# Altium PCB LedMatrixDigit.PCBDOC
Units mm, origin at the board's own origin, x right, y up, seen from the top; angles counter-clockwise.
Board outline 37.54 x 53.34 mm, 2 copper layers (Top Layer, Bottom Layer); 43 components, 68 nets, 198 pads, 47 vias.
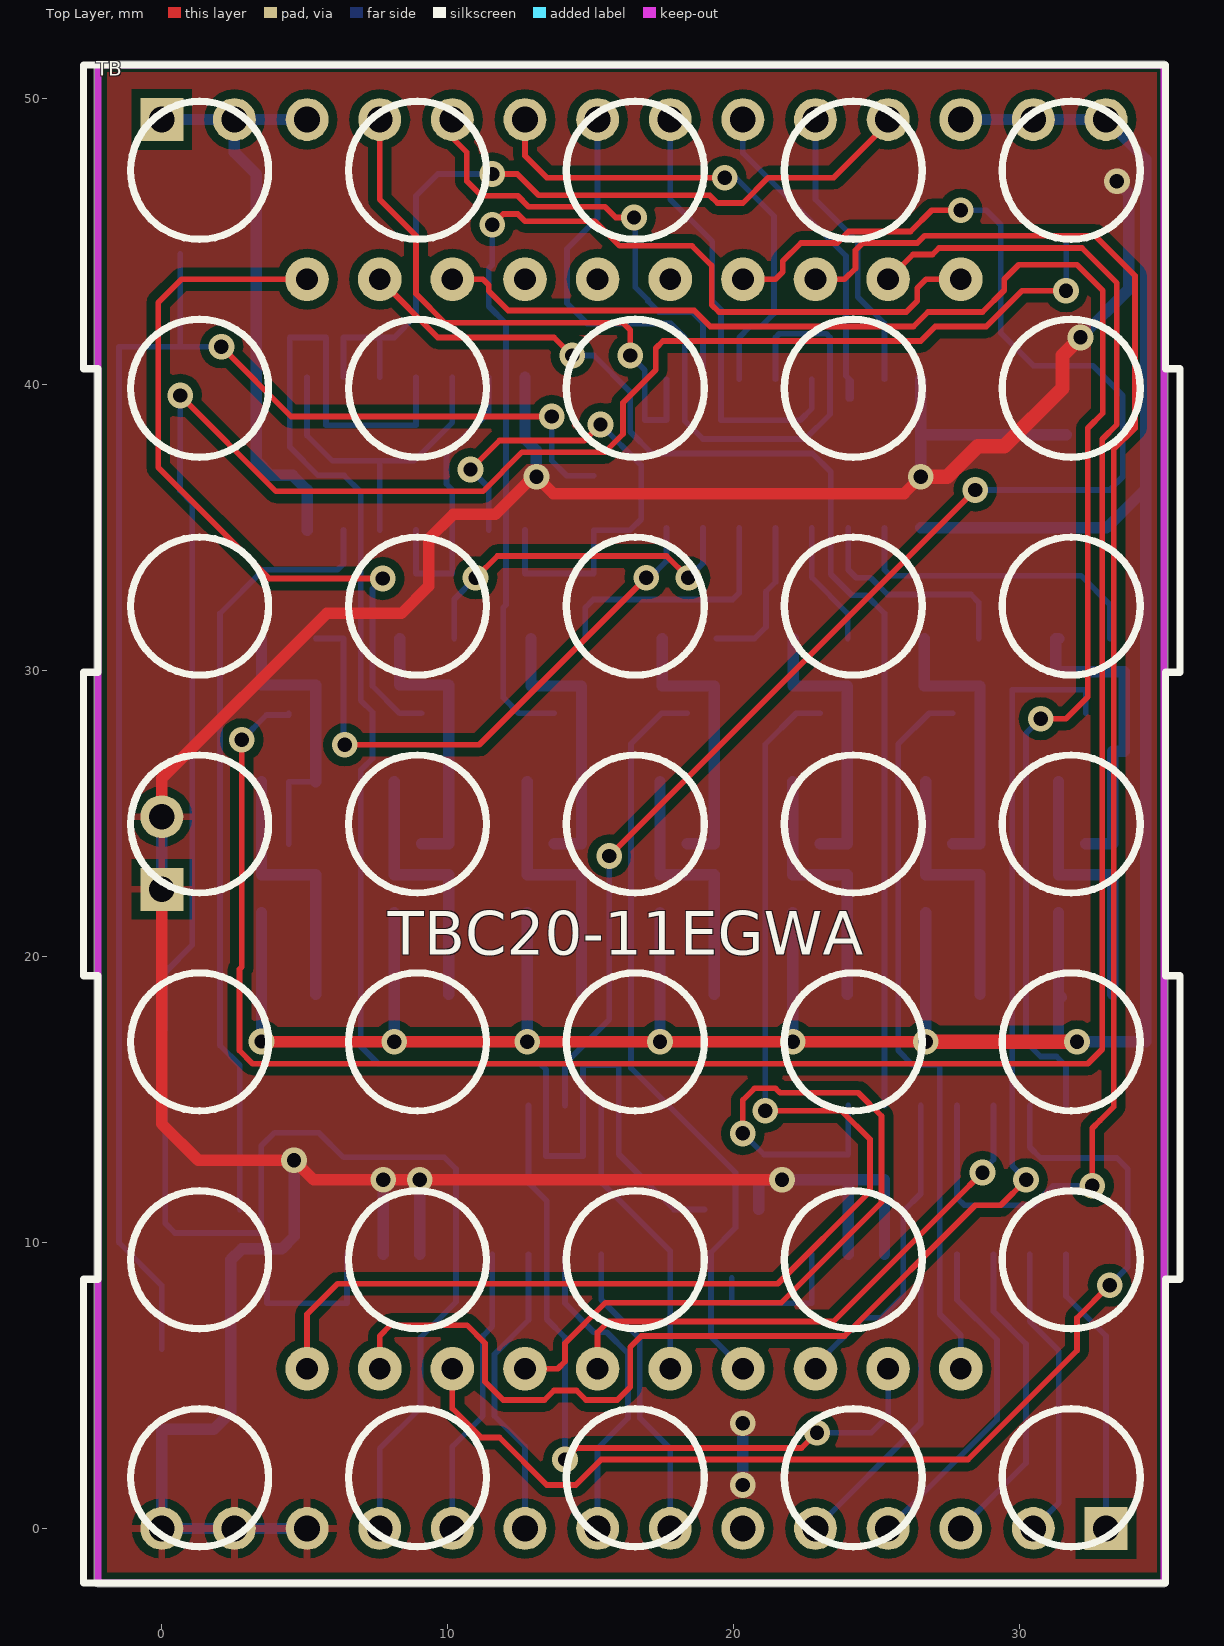
[diagram p0: Top Layer view]
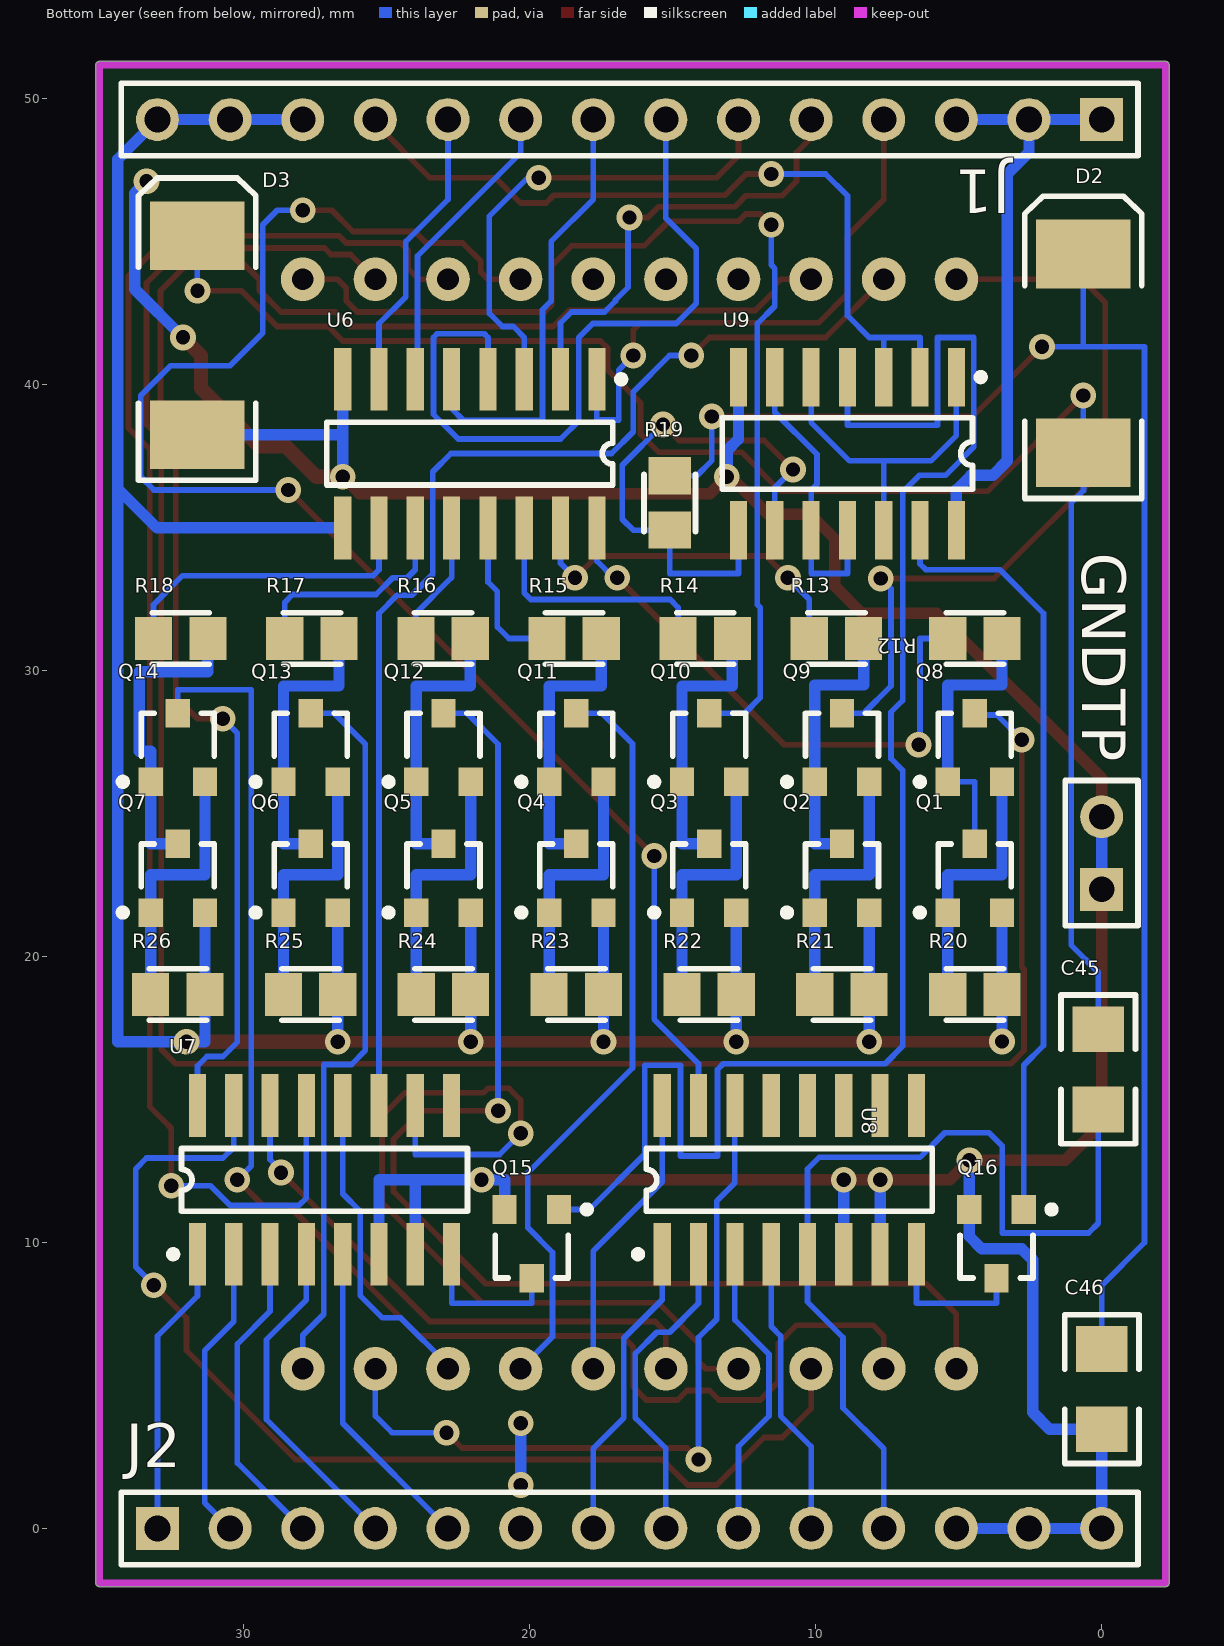
[diagram p1: Bottom Layer view, seen from below]

## Layer stack, top to bottom
Top Layer: signal copper 0.0356
Dielectric: dielectric 0.32, FR-4, Dk 4.8
Bottom Layer: signal copper 0.0356

## Board outline
-2.363,-1.905 ccw(c-2.235,-1.905) -2.235,-2.032 35.052,-2.032 ccw(c35.052,-1.905) 35.179,-1.905 35.179,51.181 ccw(c35.052,51.181) 35.052,51.308 -2.235,51.308 ccw(c-2.235,51.181) -2.363,51.181

## Design rules (kind name [scope] priority, off if disabled: settings)
Clearance Clearance_PolygonToKeepOut [InPolygon vs OnLayer('Keep-Out Layer')] p1: gap=0.1
Clearance Clearance_Polygon [InPolygon] p2: gap=0.3
Clearance Clearance_PadViaSameNet [IsPad vs IsVia] p3: gap=0.2
Clearance [All] p4: gap=0.2
FabricationTestPointUsage TestPointUsage [All] p1: valid=0 allowmultiple=FALSE
FabricationTestpoint Testpoint [All] p1: side=3 testpointundercomponent=TRUE minsize=1.016 maxsize=2.54 preferedsize=1.524 minholesize=0 maxholesize=1.016 preferedholesize=0.813 testpointgrid=0.025 allowsidetop=TRUE allowsidebottom=TRUE usegrid=TRUE gridtolerance=0
PolygonConnect [All] p1: connectstyle=Relief reliefconductorwidth=0.254 reliefentries=4 polygonreliefangle="90 Angle"
RoomDefinition LedMatrixDigit [InComponentClass('LedMatrixDigit')] p1: confinementstyle=ConfineIn formatcopy=TRUE lockcomponents=FALSE outline -3.302,-2.413 36.068,-2.413 36.068,51.689 -3.302,51.689
RoutingVias [All] p1: holewidth=0.5 width=0.9 viastyle="Through Hole" minholewidth=0.5 minwidth=0.9 maxholewidth=0.5 maxwidth=0.9
SilkscreenOverComponentPads [All] p1: minsilkscreentomaskgap=0.254
SolderMaskExpansion [All] p1: expansion=0.102
Width Width_PolygonTracks [InPolygon] p1: maxlimit=0.3 minlimit=0.2 preferedwidth=0.2
Width Width_PowerNets [InNetClass('POWERNETS')] p2: maxlimit=2.5 minlimit=0.3 preferedwidth=0.4
Width [All] p3: maxlimit=2.5 minlimit=0.2 preferedwidth=0.2
25 further rules are at their usual default settings.

## Classes and differential pairs
net class POWERNETS: 6V GND VCC
net class ROWDRIVER[6..0]: ROWDRIVER0 ROWDRIVER1 ROWDRIVER2 ROWDRIVER3 ROWDRIVER4 ROWDRIVER5 ROWDRIVER6
net class ROW[6..0]: ROW0 ROW1 ROW2 ROW3 ROW4 ROW5 ROW6
net class RED[4..0]: RED0 RED1 RED2 RED3 RED4
net class NROW[6..0]: NROW0 NROW1 NROW2 NROW3 NROW4 NROW5 NROW6
net class GREEN[4..0]: GREEN0 GREEN1 GREEN2 GREEN3 GREEN4

## Components (designator, comment, footprint, x,y, rotation, side; value= is the part's Value field where it differs from the comment)
C45 "0.22uF" C3216-1206 0.119,16.053 r270 bottom
C46 "1.0uF" C3216-1206 -0.008,4.877 r90 bottom
D2 "1N4148" DSO-C2/X3.3 0.643,41.097 r90 bottom
D3 "1N4148" DSO-C2/X3.3 31.631,41.732 r90 bottom
GNDTP "Header 2" HDR1X2 0,22.352 r90 bottom
J1 "Header 14" HDR1X14 0,49.276 r0 bottom
J2 "Header 14" HDR1X14 33.02,0 r180 bottom
Q1 "BC807-40" SOT23 4.435,22.741 r180 bottom
Q2 "BC807-40" SOT23 9.08,22.741 r180 bottom
Q3 "BC807-40" SOT23 13.726,22.741 r180 bottom
Q4 "BC807-40" SOT23 18.372,22.741 r180 bottom
Q5 "BC807-40" SOT23 23.017,22.741 r180 bottom
Q6 "BC807-40" SOT23 27.663,22.741 r180 bottom
Q7 "BC807-40" SOT23 32.309,22.741 r180 bottom
Q8 "BC807-40" SOT23 4.435,27.313 r180 bottom
Q9 "BC807-40" SOT23 9.08,27.313 r180 bottom
Q10 "BC807-40" SOT23 13.726,27.313 r180 bottom
Q11 "BC807-40" SOT23 18.372,27.313 r180 bottom
Q12 "BC807-40" SOT23 23.017,27.313 r180 bottom
Q13 "BC807-40" SOT23 27.663,27.313 r180 bottom
Q14 "BC807-40" SOT23 32.309,27.313 r180 bottom
Q15 "BSH103" SOT23 19.931,9.957 r0 bottom
Q16 "BSH103" SOT23 3.675,9.957 r0 bottom
R12 "1K" CC2012-0805 4.435,31.123 r0 bottom
R13 "1K" CC2012-0805 9.275,31.123 r0 bottom
R14 "1K" CC2012-0805 13.862,31.123 r0 bottom
R15 "1K" CC2012-0805 18.448,31.123 r0 bottom
R16 "1K" CC2012-0805 23.034,31.123 r0 bottom
R17 "1K" CC2012-0805 27.621,31.123 r0 bottom
R18 "1K" CC2012-0805 32.207,31.123 r0 bottom
R19 "1K" CC2012-0805 15.105,35.865 r270 bottom
R20 "3R9" CC2012-0805 4.435,18.677 r0 bottom
R21 "3R9" CC2012-0805 9.08,18.677 r0 bottom
R22 "3R9" CC2012-0805 13.726,18.677 r0 bottom
R23 "3R9" CC2012-0805 18.372,18.677 r0 bottom
R24 "3R9" CC2012-0805 23.017,18.677 r0 bottom
R25 "3R9" CC2012-0805 27.663,18.677 r0 bottom
R26 "3R9" CC2012-0805 32.309,18.677 r0 bottom
TB "TBC20-11EGWA" TBC20-11EGWA 5.08,5.588 r0 top locked
U6 "ULQ2003L" L16 22.098,37.592 r0 bottom
U7 "ULQ2003L" L16 27.178,12.192 r180 bottom
U8 "ULQ2003L" L16 10.922,12.192 r180 bottom
U9 "SN74LVC02AD" D014 8.89,37.592 r0 bottom

## Footprints (in the part's own frame and the unit in brackets; to place one, negate y for a bottom-side part, rotate by r counter-clockwise, add the part's x,y. Pads: shape width x height; smd on the part's side, far side on the other; paste and mask are expansions set on the pad)
C3216-1206 [mm]
  rect 1.6x1.8 smd: 1(-1.403,0) 2(1.397,0)
  silkscreen extent -2.6,-1.3 2.6,1.3
CC2012-0805 [mm]
  rect 1.3x1.5 smd: 1(-0.95,0) 2(0.95,0)
  silkscreen extent -1,-0.9 1,0.9
D014 [mm] "Small Outline; 14 Leads; Body Width 3.9 mm; Pitch 1.27 mm"
  rect 0.6x2.05 smd: 1(-3.81,-2.675) 2(-2.54,-2.675) 3(-1.27,-2.675) 4(0,-2.675) 5(1.27,-2.675) 6(2.54,-2.675) 7(3.81,-2.675) 8(3.81,2.675) 9(2.54,2.675) 10(1.27,2.675) 11(0,2.675) 12(-1.27,2.675) 13(-2.54,2.675) 14(-3.81,2.675)
  silkscreen extent -4.78,-2.8 4.37,1.25
DSO-C2/X3.3 [mm]
  rect 2.4x3.3 smd: 1(-3.475,0) 2(3.475,0)
  silkscreen extent -5.08,-2.05 5.5,2.05
HDR1X2 [mm]
  rect 1.5x1.5 hole 0.9: 1(0,0)
  round 1.5 hole 0.9: 2(2.54,0)
  silkscreen extent -1.27,-1.27 3.81,1.27
HDR1X14 [mm]
  rect 1.5x1.5 hole 0.9: 1(0,0)
  round 1.5 hole 0.9: 2(2.54,0) 3(5.08,0) 4(7.62,0) 5(10.16,0) 6(12.7,0) 7(15.24,0) 8(17.78,0) 9(20.32,0) 10(22.86,0) 11(25.4,0) 12(27.94,0) 13(30.48,0) 14(33.02,0)
  silkscreen extent -1.27,-1.27 34.29,1.27
L16 [mm] "Small Outline; 16 Leads; Body Width 3.9 mm; Pitch 1.27 mm"
  rect 0.6x2.2 smd: 1(-4.445,-2.6) 2(-3.175,-2.6) 3(-1.905,-2.6) 4(-0.635,-2.6) 5(0.635,-2.6) 6(1.905,-2.6) 7(3.175,-2.6) 8(4.445,-2.6) 9(4.445,2.6) 10(3.175,2.6) 11(1.905,2.6) 12(0.635,2.6) 13(-0.635,2.6) 14(-1.905,2.6) 15(-3.175,2.6) 16(-4.445,2.6)
  silkscreen extent -5.42,-2.72 5,1.1
SOT23 [mm] "SOT-23; 3 Leads; Body 3.0 x 2.5 mm, inc. leads (LxW max)"
  rect 0.85x1 smd: 1(-0.95,-1.2) 2(0.95,-1.2) 3(0,1.2)
  silkscreen extent -2.05,-1.32 1.27,1.2
TBC20-11EGWA [mil]
  round 60 hole 30: 1(0,0) 2(100,0) 3(200,0) 4(300,0) 5(400,0) 6(500,0) 7(600,0) 8(700,0) 9(800,0) 10(900,0) 11(900,1500) 12(800,1500) 13(700,1500) 14(600,1500) 15(500,1500) 16(400,1500) 17(300,1500) 18(200,1500) 19(100,1500) 20(0,1500)
  silkscreen extent -308,-295 1202,1795

## Part data
C45 C46: library part CAP, "Capacitor"
D2 D3: library part Diode, "Default Diode"
GNDTP: "Header, 2-Pin"
J1 J2: "Header, 14-Pin"
Q1 Q2 Q3 Q4 Q5 Q6 Q7 Q8 Q9 Q10 Q11 Q12 Q13 Q14: "PNP General-purpose Transistor"
Q15 Q16: "N-channel Enhancement Mode MOSFET"
R12 R13 R14 R15 R16 R17 R18 R19 R20 R21 R22 R23 R24 R25 R26: library part RES, "Resistor"
U6 U7 U8: "High-Voltage, High-Current Darlington Array"
U9: "Quadruple 2-Input Positive-NOR Gate"

## Via types
v1: diameter 0.9, hole 0.5, Top Layer to Bottom Layer, 47 vias

## Nets (pads, with @x,y where several pads share a name; then routed paths per layer and width w, separated by ;. In a path a pad name is that pad's centre, name@x,y a point inside that pad or via, vN(x,y) a via of type N, cw(c..) or ccw(c..) an arc to the next point about the centre after c; other vN are vias at no path point)
6V: J1.12 J1.13 J1.14 Q1.2 Q2.2 Q3.2 Q4.2 Q5.2 Q6.2 Q7.2 R20.1 R21.1 R22.1 R23.1 R24.1 R25.1 R26.1 U6.9 | length 109.7
  Top Layer w0.4: v1@3.495,17.018 v1(26.713,17.018)
  Top Layer w0.5: v1(26.713,17.018) v1(32.004,17.018)
  Bottom Layer w0.4: v1(3.485,17.028) R20.1 Q1.2 ; v1(8.13,17.018) R21.1 Q2.2 ; v1(12.776,17.018) R22.1 12.776,21.514 Q3.2 ; v1(17.422,17.018) R23.1 Q4.2 ; v1(22.067,17.018) R24.1 Q5.2 ; U6.9 33.036,34.992 34.417,36.373 ; v1(26.713,17.018) R25.1 Q6.2 ; J1.12 J1.13 J1.14 34.417,47.879 34.417,17.018 31.359,17.018 Q7.2 ; R26.1 R26.1@31.454,18.582
CG1: TB.18 U7.16 | length 56.1
  Top Layer w0.2: TB.18 11.227,43.688 11.43,43.485 11.43,43.282 12.116,42.596 18.618,42.596 19.177,42.037 26.289,42.037 26.797,42.545 28.702,42.545 29.464,43.307 29.464,43.688 29.972,44.196 32.004,44.196 32.911,43.289 32.911,39.007 32.385,38.481 32.385,29.083 31.623,28.321 v1(30.734,28.321)
  Bottom Layer w0.2: v1(30.734,28.321) 30.226,27.813 30.226,17.018 30.734,16.51 31.293,16.51 31.623,16.18 U7.16
CG2: TB.3 U7.15 | length 38.6
  Top Layer w0.2: TB.3 10.16,4.191 11.173,3.178 11.808,3.178 13.462,1.524 14.478,1.524 15.367,2.413 28.194,2.413 32.004,6.223 32.004,7.366 v1(33.147,8.509)
  Bottom Layer w0.2: U7.15 30.353,13.335 30.734,12.954 33.401,12.954 33.782,12.573 33.782,9.144 v1(33.147,8.509)
CG3: TB.5 U7.14 | length 20.2
  Top Layer w0.2: TB.5 15.24,6.858 15.621,7.239 23.495,7.239 v1(28.702,12.446) 28.24,11.984
  Bottom Layer w0.2: v1(28.702,12.446) 28.702,12.522 29.083,12.903 U7.14
CG4: TB.13 U7.13 | length 53.6
  Top Layer w0.2: TB.13 23.876,43.688 24.257,44.069 24.257,44.704 24.511,44.958 26.416,44.958 26.67,45.212 32.639,45.212 34.036,43.815 34.036,38.481 33.287,37.732 33.287,14.745 32.811,14.27 32.537,13.995 v1(32.537,11.989)
  Bottom Layer w0.2: U7.13 27.813,11.557 28.067,11.303 30.48,11.303 31.166,11.989 v1(32.537,11.989)
CG5: TB.8 U7.12 | length 11.1
  Bottom Layer w0.2: TB.8 22.86,5.715 24.511,7.366 25.146,7.366 25.933,8.153 25.933,11.1 26.543,11.709 U7.12
CR1: TB.19 U7.11 | length 42.6
  Top Layer w0.2: TB.19 9.652,41.656 13.716,41.656 v1(14.351,41.021)
  Bottom Layer w0.2: v1(14.351,41.021) 15.113,41.021 16.383,39.751 16.383,38.354 17.145,37.592 22.758,37.592 23.393,36.957 23.393,33.376 24.13,32.639 24.638,32.639 25.273,32.004 U7.11
CR2: TB.4 U7.10 | length 30.7
  Top Layer w0.2: TB.4 13.843,5.588 14.097,5.842 14.097,6.477 ; 14.166,6.546 14.097,6.477 ; v1(20.32,13.818) 20.32,14.986 20.726,15.392 21.463,15.392 21.615,15.24 24.359,15.24 25.171,14.427 25.171,11.405 21.666,7.899 15.519,7.899 14.097,6.477
  Bottom Layer w0.2: v1(20.32,13.818) 21.057,13.081 24.003,13.081 U7.10
CR3: TB.6 U8.16 | length 10.2
  Bottom Layer w0.2: U8.16 15.367,12.116 17.78,9.703 TB.6
CR4: TB.14 U8.15 | length 55.1
  Top Layer w0.2: v1(15.646,23.52) v1(28.448,36.322) ; TB.14 21.463,43.688 21.717,43.942 21.717,44.323 22.352,44.958 23.622,44.958 24.022,45.358 26.181,45.358 26.924,46.101 v1(27.94,46.101)
  Bottom Layer w0.2: U8.15 14.097,16.256 15.646,17.805 v1(15.646,23.52) ; v1(27.94,46.101) 28.829,46.101 29.337,45.593 29.337,41.808 30.48,40.665 32.563,40.665 33.604,39.624 33.604,36.779 33.147,36.322 v1(28.448,36.322)
CR5: TB.9 U8.14 | length 26.5
  Top Layer w0.2: v1(14.097,2.413) 14.497,2.813 22.371,2.813 v1(22.91,3.352)
  Bottom Layer w0.2: U8.14 12.827,12.09 13.462,11.455 13.462,7.315 14.097,6.68 v1(14.097,2.413) ; v1(22.91,3.352) 24.815,3.352 25.4,3.937 TB.9
ENABLE: J1.11 U9.2 U9.3 | length 28.4
  Top Layer w0.2: v1(11.557,47.371) 12.427,47.371 13.17,46.628 19.158,46.628 19.431,46.355 20.32,46.355 21.209,47.244 23.501,47.244 25.4,49.143 J1.11
  Bottom Layer w0.2: U9.2 6.35,41.656 8.128,41.656 8.89,42.418 8.89,46.609 9.652,47.371 v1(11.557,47.371) ; U9.3 7.62,41.656
GND: C46.1 D3.1 GNDTP.1 GNDTP.2 J2.12 J2.13 J2.14 Q15.2 Q16.2 U6.8 U7.6 U7.7 U8.6 U8.7 U9.7 | length 133.5
  Top Layer w0.4: GNDTP.1 0,14.148 1.27,12.878 v1(4.625,12.878) 5.311,12.192 v1(7.747,12.192) v1(9.017,12.192) v1(21.692,12.192) ; GNDTP.2 0,26.238 5.766,32.004 8.382,32.004 9.329,32.951 9.329,34.602 10.196,35.469 11.669,35.469 12.979,36.779 v1(13.106,36.779) 13.691,36.195 25.959,36.195 v1(26.543,36.779)
  Top Layer w0.5: v1(26.543,36.779) 27.465,36.779 28.532,37.846 29.464,37.846 31.496,39.878 31.496,41.021 v1(32.131,41.656)
  Bottom Layer w0.4: GNDTP.1 GNDTP.2 ; v1(4.625,12.878) Q16.2 4.625,10.213 4.191,9.779 2.794,9.779 2.413,9.398 2.413,4.064 1.823,3.474 C46.1 0,3.466 J2.14 J2.13 J2.12 ; U8.7 v1(7.747,12.192) ; U8.6 v1(9.017,12.192) ; U9.7 12.7,38.1 13.09,37.71 13.09,36.796 v1(13.106,36.779) ; v1(20.32,1.524) v1(20.32,3.683) ; Q15.2 20.881,12.192 v1(21.692,12.192) 24.003,12.192 ; U7.7 24.003,12.192 ; U7.6 25.273,12.192 24.003,12.192 ; v1(26.543,36.779) U6.8 ; 26.543,38.227 26.573,38.257 D3.1 ; v1(32.131,41.656) 33.817,43.342 33.817,46.701 v1(33.401,47.117)
GREEN0: J2.1 U7.1 | length 10.2
  Bottom Layer w0.2: U7.1 31.623,8.128 33.02,6.731 J2.1
GREEN1: J2.2 U7.2 | length 10.4
  Bottom Layer w0.2: U7.2 30.353,7.239 31.369,6.223 31.369,0.889 J2.2
GREEN2: J2.3 U7.3 | length 11
  Bottom Layer w0.2: J2.3 30.226,2.286 30.226,6.452 29.083,7.595 U7.3
GREEN3: J2.4 U7.4 | length 11.7
  Bottom Layer w0.2: J2.4 29.21,3.81 29.21,6.604 27.813,8.001 U7.4
GREEN4: J2.5 U7.5 | length 11.1
  Bottom Layer w0.2: J2.5 26.543,3.683 U7.5
NetC45_1: C45.1 D2.1 D3.2 | length 61
  Top Layer w0.2: v1(0.643,39.624) 3.996,36.271 11.227,36.271 12.598,37.643 15.494,37.643 16.129,38.278 16.129,39.37 17.272,40.513 17.272,41.275 17.526,41.529 26.543,41.529 27.051,42.037 28.829,42.037 30.08,43.288 v1(31.623,43.288)
  Bottom Layer w0.2: C45.1 0.119,19.456 1.067,20.404 1.067,35.865 0.635,36.297 0.635,37.622 D2.1 v1(0.643,39.624) ; v1@31.631,43.296 D3.2
NetC46_2: C46.2 D2.2 R19.1 | length 58.3
  Top Layer w0.2: v1(2.083,41.326) 4.521,38.887 v1(13.64,38.887)
  Bottom Layer w0.2: C46.2 -0.008,8.509 -1.499,10 -1.499,41.326 v1(2.083,41.326) ; 0.643,41.326 D2.2 ; v1(13.64,38.887) 13.64,37.338 14.163,36.815 R19.1
NetQ1_1: Q1.1 Q8.2 R20.2 | length 9.3
  Bottom Layer w0.4: Q8.2 3.485,22.86 5.385,22.86 Q1.1 R20.2
NetQ1_3: Q1.3 Q8.1 R12.1 | length 10
  Bottom Layer w0.2: Q1.3 4.435,26.113 Q8.1
  Bottom Layer w0.4: R12.1 3.485,29.5 5.385,29.5 Q8.1
NetQ2_1: Q2.1 Q9.2 R21.2 | length 9.3
  Bottom Layer w0.4: Q9.2 8.13,22.86 10.03,22.86 Q2.1 R21.2
NetQ2_3: Q2.3 Q9.1 R13.1 | length 9.8
  Bottom Layer w0.4: R13.1 8.325,29.5 10.03,29.5 Q9.1 10.03,23.941 Q2.3
NetQ3_1: Q3.1 Q10.2 R22.2 | length 9.3
  Bottom Layer w0.4: Q10.2 12.776,22.86 14.676,22.86 Q3.1 R22.2
NetQ3_3: Q3.3 Q10.1 R14.1 | length 9.9
  Bottom Layer w0.4: R14.1 12.912,29.464 14.676,29.464 Q10.1 14.676,23.941 Q3.3
NetQ4_1: Q4.1 Q11.2 R23.2 | length 9.3
  Bottom Layer w0.4: Q11.2 17.422,22.86 19.322,22.86 Q4.1 R23.2
NetQ4_3: Q4.3 Q11.1 R15.1 | length 10
  Bottom Layer w0.4: R15.1 17.498,29.464 19.322,29.464 Q11.1 19.322,23.941 Q4.3
NetQ5_1: Q5.1 Q12.2 R24.2 | length 9.3
  Bottom Layer w0.2: Q12.2 Q12.2@22.073,26.113
  Bottom Layer w0.4: Q12.2 22.067,22.86 23.967,22.86 Q5.1 R24.2
NetQ5_3: Q5.3 Q12.1 R16.1 | length 10.1
  Bottom Layer w0.2: R16.1@21.971,31.123 R16.1
  Bottom Layer w0.4: R16.1 22.084,29.464 23.967,29.464 Q12.1 23.967,23.941 Q5.3
NetQ6_1: Q6.1 Q13.2 R25.2 | length 9.3
  Bottom Layer w0.4: Q13.2 26.713,22.86 28.613,22.86 Q6.1 R25.2
NetQ6_3: Q6.3 Q13.1 R17.1 | length 10.1
  Bottom Layer w0.4: R17.1 26.671,29.464 28.613,29.464 Q13.1 28.613,23.941 Q6.3
NetQ7_1: Q7.1 Q14.2 R26.2 | length 9.3
  Bottom Layer w0.4: Q14.2 31.359,22.86 33.259,22.86 Q7.1 R26.2
NetQ7_3: Q7.3 Q14.1 R18.1 | length 11
  Bottom Layer w0.4: R18.1@31.369,31.123 R18.1 31.257,29.957 33.655,29.957 33.655,27.178 33.259,27.178 Q14.1 33.259,23.941 Q7.3
NetQ15_1: Q15.1 U9.4 | length 58.3
  Bottom Layer w0.2: U9.4 8.89,38.583 5.74,38.583 5.74,41.656 4.47,41.656 4.47,37.821 5.461,36.83 6.375,36.83 6.96,36.246 6.96,28.956 7.366,28.55 7.366,26.924 6.96,26.518 6.96,16.866 7.569,16.256 13.233,16.256 13.437,16.053 13.437,13.03 14.732,13.03 14.732,16.205 15.977,16.205 15.977,13.087 17.907,11.157 Q15.1
NetQ15_3: Q15.3 U7.8 | length 5.4
  Bottom Layer w0.2: Q15.3 19.931,7.874 22.733,7.874 U7.8
NetQ16_1: Q16.1 U9.13 | length 27.4
  Bottom Layer w0.2: Q16.1 2.725,16.198 2.032,16.891 2.032,32.004 3.556,33.528 6.147,33.528 6.35,33.731 U9.13
NetQ16_3: Q16.3 U8.8 | length 5.4
  Bottom Layer w0.2: Q16.3 3.675,7.882 6.477,7.882 U8.8
NetR19_2: R19.2 U9.8 U9.9 | length 18.7
  Top Layer w0.2: v1(10.795,37.033) 11.811,38.049 14.783,38.049 v1(15.342,38.608)
  Bottom Layer w0.2: v1(10.795,37.033) 11.43,36.398 U9.9 ; U9.8 12.7,33.401 15.105,33.401 R19.2 16.383,34.915 16.764,35.296 16.764,37.186 v1(15.342,38.608)
NetU9_1: U9.1 U9.5 U9.12 | length 12
  Bottom Layer w0.2: U9.1 5.08,38.227 5.969,37.338 7.62,37.338 ; U9.12 7.62,37.338 ; U9.5 10.16,38.684 8.814,37.338 7.62,37.338
NetU9_6: U9.6 U9.10 U9.11 | length 10.3
  Bottom Layer w0.2: U9.11 8.89,33.401 10.16,33.401 10.16,36.322 9.957,36.525 9.957,37.567 11.43,39.04 U9.6
NROW0: R12.2 U6.16 | length 19.7
  Top Layer w0.2: v1(6.401,27.407) 11.1,27.407 v1(16.942,33.249)
  Bottom Layer w0.2: R12.2 6.35,31.123 v1@6.35,27.432 ; v1(16.942,33.249) 17.069,33.249 17.653,33.833 U6.16
NROW1: R13.2 U6.15 | length 12.5
  Top Layer w0.2: v1(10.973,33.249) 11.735,34.011 17.653,34.011 v1(18.415,33.249)
  Bottom Layer w0.2: R13.2 10.225,32.501 v1(10.973,33.249) ; v1(18.415,33.249) 18.923,33.757 U6.15
NROW2: R14.2 U6.14 | length 9
  Bottom Layer w0.2: R14.2 14.812,32.211 15.088,32.487 19.964,32.487 20.193,32.715 U6.14
NROW3: R15.2 U6.13 | length 5.5
  Bottom Layer w0.2: R15.2 20.726,31.123 21.133,31.529 21.133,32.766 21.463,33.096 U6.13
NROW4: R16.2 U6.12 | length 4.4
  Bottom Layer w0.2: U6.12 22.733,33.255 23.984,32.004 R16.2
NROW5: R17.2 U6.11 | length 7.8
  Bottom Layer w0.2: U6.11 24.003,33.528 24.283,33.248 24.791,33.248 25.375,32.664 28.296,32.664 28.571,32.389 R17.2
NROW6: R18.2 U6.10 | length 11
  Bottom Layer w0.2: U6.10 25.273,33.528 25.476,33.325 32.141,33.325 33.157,32.309 R18.2
RED0: J2.7 U8.1 | length 10.6
  Bottom Layer w0.2: U8.1 15.367,8.001 16.713,6.655 16.713,3.861 17.78,2.794 J2.7
RED1: J2.8 U8.2 | length 11.2
  Bottom Layer w0.2: U8.2 14.097,7.874 15.105,6.866 15.562,6.866 16.307,6.121 16.307,3.861 15.24,2.794 J2.8
RED2: J2.9 U8.3 | length 10.5
  Bottom Layer w0.2: J2.9 12.7,2.87 11.633,3.937 11.633,6.096 12.827,7.29 U8.3
RED3: J2.10 U8.4 | length 10.2
  Bottom Layer w0.2: J2.10 10.16,2.87 11.227,3.937 11.227,6.731 11.557,7.061 U8.4
RED4: C45.2 J2.11 U8.5 | length 31.7
  Bottom Layer w0.2: C45.2 0.119,10.676 0.457,10.338 3.48,10.338 3.48,13.386 3.937,13.843 5.486,13.843 6.35,12.979 9.881,12.979 10.287,12.573 U8.5 10.287,7.925 9.042,6.68 9.042,4.216 7.62,2.794 J2.11
ROW0: J1.4 U6.1 | length 20.2
  Top Layer w0.2: J1.4 7.62,46.482 8.89,45.212 8.89,43.18 9.906,42.164 16.129,42.164 16.383,41.91 v1(16.383,41.021)
  Bottom Layer w0.2: v1(16.383,41.021) 16.891,40.513 16.891,38.767 17.653,38.767 U6.1
ROW1: J1.5 U6.2 | length 16.1
  Top Layer w0.2: J1.5 10.16,48.635 10.668,48.127 10.668,47.117 11.176,46.609 12.446,46.609 12.827,46.228 15.494,46.228 15.875,45.847 v1(16.51,45.847)
  Bottom Layer w0.2: v1(16.51,45.847) 16.561,45.796 16.561,43.406 17.004,42.963 17.004,42.924 17.383,42.545 18.542,42.545 18.923,42.164 U6.2
ROW2: J1.6 U6.3 | length 17.3
  Top Layer w0.2: J1.6 12.7,48.006 13.462,47.244 v1(19.685,47.244)
  Bottom Layer w0.2: v1(19.685,47.244) 20.066,47.244 21.412,45.898 21.412,42.494 20.955,42.037 20.574,42.037 20.193,41.656 U6.3
ROW3: J1.7 U6.4 | length 26.3
  Bottom Layer w0.2: J1.7 15.24,45.822 14.173,44.755 14.173,42.85 14.878,42.145 17.799,42.145 18.288,41.656 18.288,38.735 18.923,38.1 22.504,38.1 23.368,38.964 23.368,41.656 23.241,41.783 21.59,41.783 21.463,41.656 U6.4
ROW4: J1.8 U6.5 | length 15.6
  Bottom Layer w0.2: J1.8 17.78,46.482 19.253,45.009 19.253,42.926 19.558,42.621 19.558,38.76 22.327,38.76 22.733,39.167 U6.5
ROW5: J1.9 U6.6 | length 12.1
  Bottom Layer w0.2: J1.9 20.32,48.108 23.927,44.501 23.927,40.31 24.024,40.213 24.105,40.132 24.105,39.522 24.003,39.522 U6.6
ROW6: J1.10 U6.7 | length 10.1
  Bottom Layer w0.2: J1.10 22.86,46.482 24.333,45.009 24.333,43.078 25.273,42.139 U6.7
ROWDRIVER0: Q8.3 TB.12 | length 79.5
  Top Layer w0.2: v1(2.794,27.584) 2.794,19.634 2.718,19.558 2.718,16.713 3.175,16.256 32.385,16.256 32.887,16.758 32.887,38.094 33.401,38.608 33.401,43.561 32.182,44.78 27.178,44.78 26.956,44.558 26.27,44.558 TB.12
  Bottom Layer w0.2: v1(2.794,27.584) 3.658,28.448 4.435,28.448 Q8.3
ROWDRIVER1: Q9.3 TB.20 | length 26.8
  Top Layer w0.2: TB.20 0.686,43.688 -0.127,42.875 -0.127,37.109 3.759,33.223 v1(7.722,33.223)
  Bottom Layer w0.2: v1(7.722,33.223) 7.366,32.868 7.366,29.464 8.317,28.513 Q9.3
ROWDRIVER2: Q10.3 TB.11 | length 38.7
  Top Layer w0.2: v1(11.557,45.593) 11.938,45.974 12.446,45.974 12.7,45.72 15.138,45.72 16.002,44.856 18.542,44.856 19.228,44.171 19.228,42.799 19.482,42.545 26.035,42.545 26.416,42.926 26.416,43.379 26.725,43.688 TB.11
  Bottom Layer w0.2: v1@11.792,45.358 v1(11.557,45.593) 11.557,44.196 11.43,44.069 11.43,42.748 12.04,42.139 12.04,32.309 11.938,32.207 11.938,29.058 12.483,28.513 Q10.3
ROWDRIVER3: Q11.3 TB.7 | length 26.6
  Bottom Layer w0.2: Q11.3 17.475,28.513 16.408,27.446 16.408,16.104 20.066,12.446 20.066,10.516 19.202,9.652 19.202,6.706 TB.7
ROWDRIVER4: Q12.3 TB.1 | length 44.4
  Top Layer w0.2: TB.1 5.08,7.493 6.147,8.56 21.539,8.56 24.765,11.786 24.765,13.614 23.774,14.605 v1(21.107,14.605)
  Bottom Layer w0.2: v1(21.107,14.605) 21.107,27.432 22.188,28.513 Q12.3
ROWDRIVER5: Q13.3 TB.10 | length 25.7
  Bottom Layer w0.2: Q13.3 26.837,28.513 25.756,27.432 25.756,16.713 26.238,16.231 27.203,16.231 27.203,7.493 27.94,6.756 TB.10
ROWDRIVER6: Q14.3 TB.2 | length 50.8
  Top Layer w0.2: TB.2 7.62,6.731 8.001,7.112 10.668,7.112 11.303,6.477 11.303,5.131 11.938,4.496 13.386,4.496 13.716,4.826 14.5,4.826 14.83,4.496 15.926,4.496 16.383,4.953 16.383,6.35 16.764,6.731 23.876,6.731 28.448,11.303 29.337,11.303 v1(30.226,12.192)
  Bottom Layer w0.2: v1(30.226,12.192) 29.743,12.675 29.743,29.337 32.309,29.337 Q14.3
VCC: J1.1 J1.2 J1.3 U9.14 | length 20.9
  Bottom Layer w0.4: J1.1 J1.2 ; U9.14 5.08,36.322 4.572,36.83 3.81,36.83 3.302,37.338 3.302,47.371 2.54,48.133 J1.2 ; J1.3 J1.2
pads on no net: J2.6 TB.15 TB.16 TB.17 U7.9 U8.9 U8.10 U8.11 U8.12 U8.13

## Polygon pours and split planes (outlines as drawn)
GND on Top Layer "Top Layer-GND" (solid, remove dead copper, pour order 1000): -2.032,50.927 34.798,50.927 34.798,-1.524 -1.905,-1.524 -1.905,50.927

## Keep-outs
Keep-Out Layer:
  lines w0.254: -2.235,-1.905 -2.235,51.181 35.052,51.181 35.052,-1.905 -2.235,-1.905